# Altium PCB PCB1.PcbDoc
Units mil, origin at the board's own origin, x right, y up, seen from the top; angles counter-clockwise.
Board outline 6000 x 4000 mil, 2 copper layers (Top Layer, Bottom Layer); 72 components, 79 nets, 323 pads, 0 vias.
Unrouted connection lines stored in the file: 220.
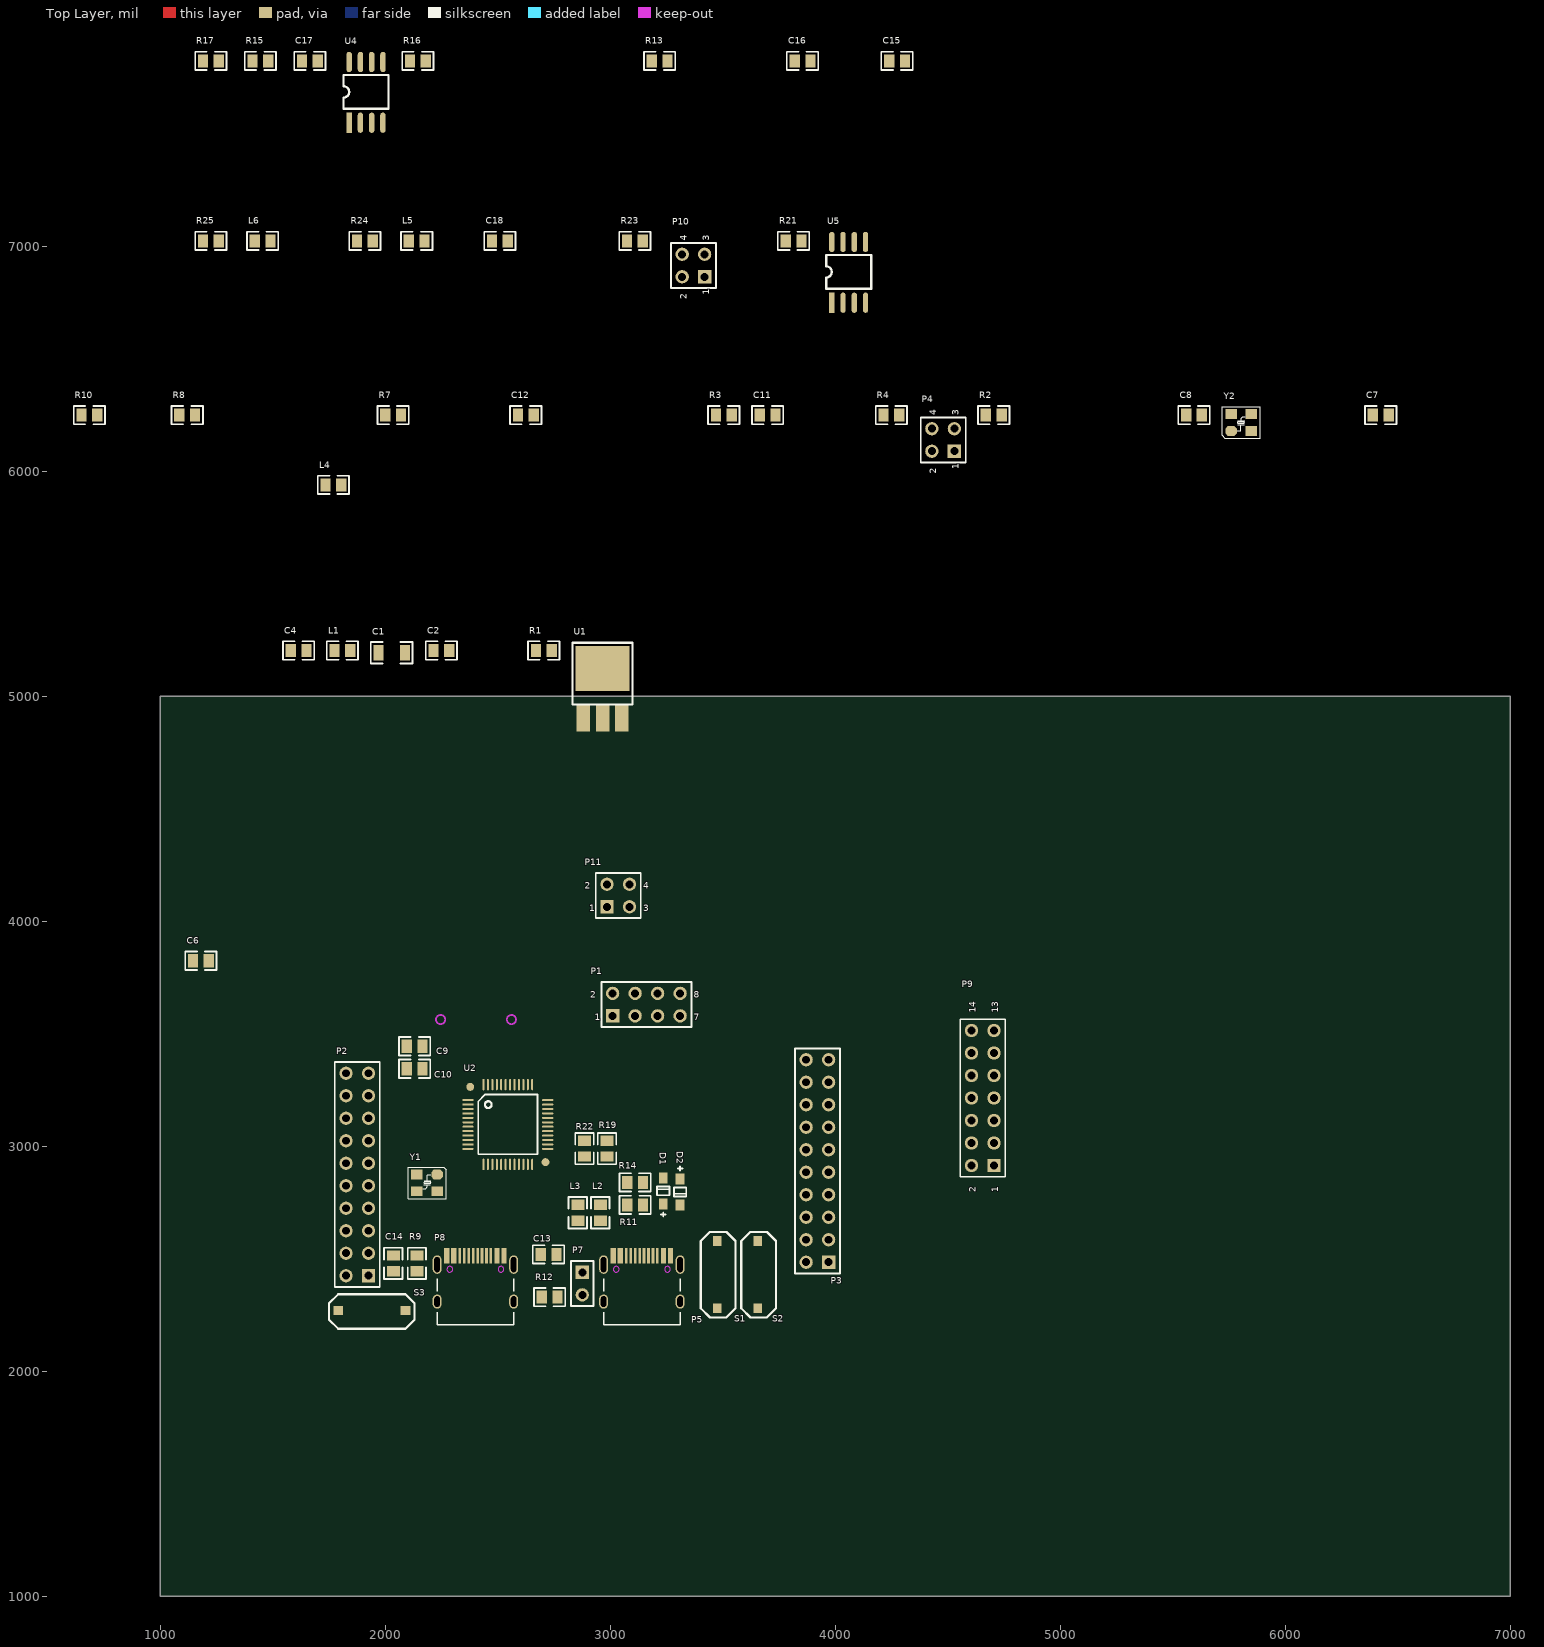
[diagram p0: Top Layer view]
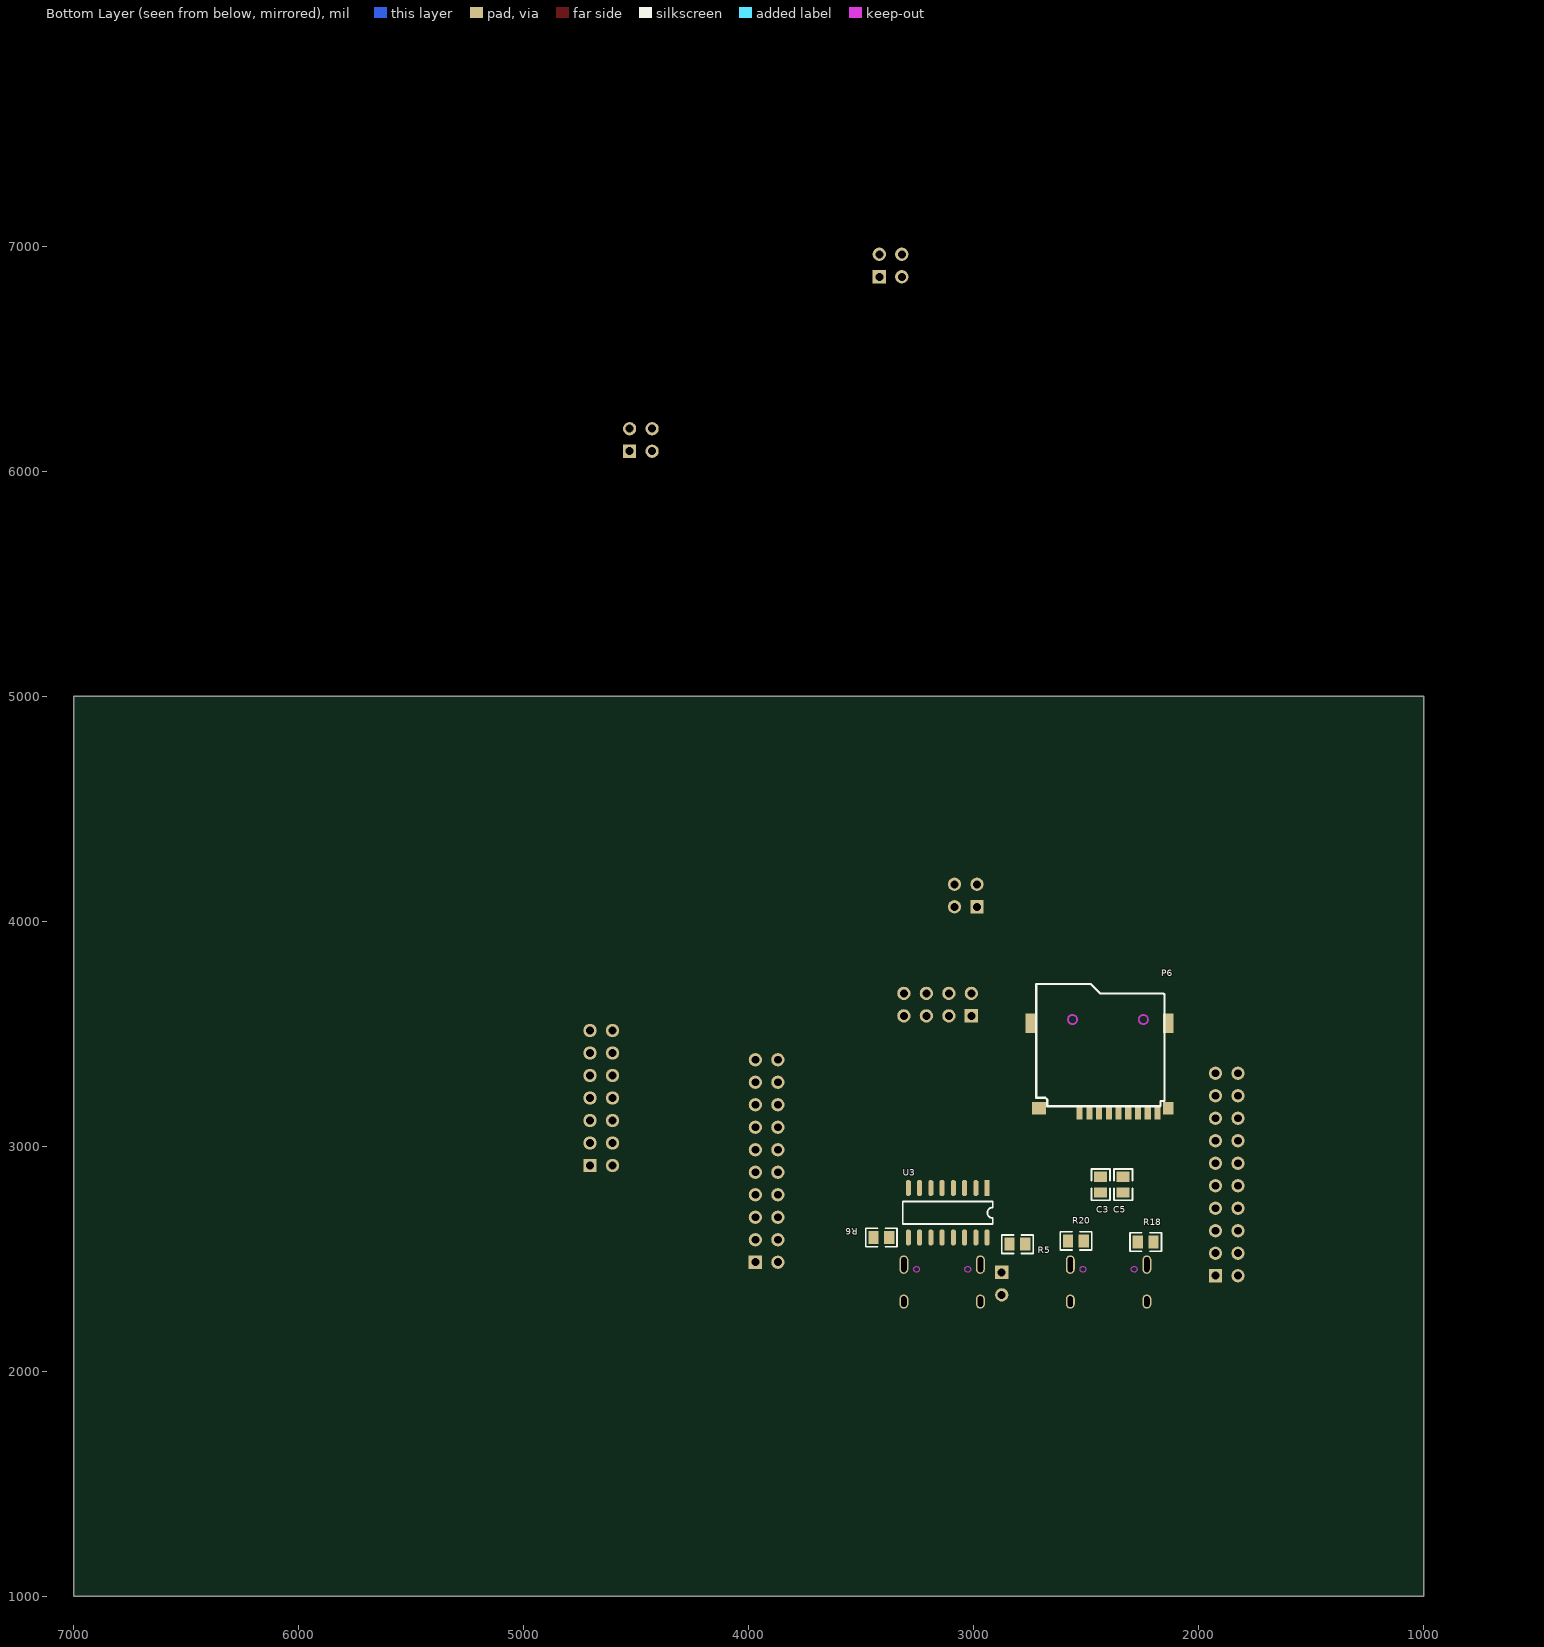
[diagram p1: Bottom Layer view, seen from below]

## Layer stack, top to bottom
Top Solder: solder mask 0.4, Solder Resist, Dk 3.5
Top Layer: signal copper 1.4
Dielectric 1: dielectric 12.6, FR-4, Dk 4.8
Bottom Layer: signal copper 1.4
Bottom Solder: solder mask 0.4, Solder Resist, Dk 3.5

## Board outline
1000,1000 7000,1000 7000,5000 1000,5000

## Design rules (kind name [scope] priority, off if disabled: settings)
Clearance [All] p1: gap=5 ignorepadtopadclearanceinfootprint=FALSE
PolygonConnect [All] p1: connectstyle=Relief reliefconductorwidth=10 reliefentries=4 polygonreliefangle="90 Angle" airgapwidth=10
RoutingVias [All] p1: holewidth=28 width=50 viastyle="Through Hole" minholewidth=28 minwidth=50 maxholewidth=28 maxwidth=50
SolderMaskExpansion [All] p1: expansion=4 istentingtop=FALSE
Width [All] p1: maxlimit=10 minlimit=10 preferedwidth=10
30 further rules are at their usual default settings.

## Components (designator, comment, footprint, x,y, rotation, side; value= is the part's Value field where it differs from the comment)
C1 "10uF" 1206 1969,5194 r0 top
C2 "2.2uF" 0805 2214,5204 r0 top
C3 "12pF" 0805 2435,2865.08 r270 bottom
C4 "0.1uF" 0805 1579,5204 r0 top
C5 "12pF" 0805 2335,2865.08 r270 bottom
C6 "20pF" 0805 1144.92,3825 r0 top
C7 "0.1uF" 0805 6389,6250 r0 top
C8 "20pF" 0805 5559,6250 r0 top
C9 "Cap" 0805 2095,3445 r0 top value=0.1uF
C10 "Cap" 0805 2095,3345 r0 top value=0.1uF
C11 "0.1uF" 0805 3664,6250 r0 top
C12 "0.1uF" 0805 2589,6250 r0 top
C13 "0.1uF" 0805 2760,2520 r180 top
C14 "0.1uF" 0805 2035,2444.92 r90 top
C15 "10uF" 0805 4239,7825 r0 top
C16 "0.1uF" 0805 3819,7825 r0 top
C17 "0.1uF" 0805 1629,7825 r0 top
C18 "0.1uF" 0805 2474,7025 r0 top
D1 "B0520" SOD-123 3235,2743.86 r90 top
D2 "B0520" SOD-123 3310,2855 r270 top
L1 "LED" 0805 1774,5204 r0 top
L2 "LED" 0805 2955,2669.92 r90 top
L3 "LED" 0805 2855,2669.92 r90 top
L4 "LED" 0805 1734,5940 r0 top
L5 "LED" 0805 2104,7025 r0 top
L6 "LED" 0805 1419,7025 r0 top
P1 "Header 4X2" HDR2X4 3010,3580 r0 top
P2 "Header 10X2" HDR2X10 1925,2425 r90 top
P3 "Header 10X2" HDR2X10 3970,2485 r90 top
P4 "Header 2X2" HDR2X2 4529,6090 r90 top
P5 "USBC-REC" TYPE-C-Receptacle-2.0 3139.84,2512.76 r0 top
P6 "TF_CARD" TF_CARD 2528.7,3150.32 r180 bottom
P7 "Header 2" HDR1X2 2875,2440 r270 top
P8 "USBC-REC" TYPE-C-Receptacle-2.0 2399.92,2512.76 r0 top
P9 "Header 7X2" HDR2X7 4705,2915 r90 top
P10 "Header 2X2" HDR2X2 3419,6865 r90 top
P11 "Header 2X2" HDR2X2 2985,4065 r0 top
R1 "1K" 0805 2669,5204 r0 top
R2 "10K" 0805 4669,6250 r0 top
R3 "10K" 0805 3469,6250 r0 top
R4 "0" 0805 4214,6250 r0 top
R5 "5.1K" 0805 2769.92,2565 r0 bottom value=5.1k
R6 "5.1K" 0805 3445,2595 r180 bottom value=5.1k
R7 "10K" 0805 1999,6250 r0 top
R8 "10K" 0805 1084,6250 r0 top
R9 "10K" 0805 2140,2444.92 r90 top
R10 "0" 0805 649,6250 r0 top
R11 "1K" 0805 3075,2740 r0 top
R12 "1K" 0805 2694.92,2330 r0 top
R13 "10K" 0805 3184,7825 r0 top
R14 "1K" 0805 3074.92,2840 r0 top
R15 "10K" 0805 1409,7825 r0 top
R16 "1K" 0805 2109,7825 r0 top
R17 "10K" 0805 1189,7825 r0 top
R18 "5.1K" 0805 2199.92,2575 r0 bottom value=5.1k
R19 "270" 0805 2985,2955 r90 top
R20 "5.1K" 0805 2580,2580 r180 bottom value=5.1k
R21 "10K" 0805 3779,7025 r0 top
R22 "270" 0805 2885,2954.92 r90 top
R23 "0" 0805 3074,7025 r0 top
R24 "1K" 0805 1874,7025 r0 top
R25 "1K" 0805 1189,7025 r0 top
S1 "SW-PB" "sw - 3*6*2.5" 3475,2280 r90 top
S2 "SW-PB" "sw - 3*6*2.5" 3655,2280 r90 top
S3 "SW-PB" "sw - 3*6*2.5" 1790,2270 r0 top
U1 "TLV1117" SOT-223 2879,4904 r0 top
U2 "CH32V203CxT" LQFP48 2367.05,3205.43 r270 top
U3 "CH549G" SOP16 2940,2815 r0 bottom
U4 "24c01" SOIC-8_208mil 1839,7550 r0 top
U5 "w25q16" SOIC-8_208mil 3984,6750 r0 top
Y1 "32.768" XT3225 2230,2875 r180 top
Y2 "8M" XT3225 5759,6180 r0 top

## Footprints (in the part's own frame and the unit in brackets; to place one, negate y for a bottom-side part, rotate by r counter-clockwise, add the part's x,y. Pads: shape width x height; smd on the part's side, far side on the other; paste and mask are expansions set on the pad)
0805 [mm]
  rect 1.16x1.47 smd: 1(0,0) 2(1.78,0)
  silkscreen extent -0.88,-1.04 2.66,1.03
1206 [mm]
  rect 1.13x1.8 smd: 1(0,0) 2(2.98,0)
  silkscreen extent -0.87,-1.2 3.84,1.2
HDR1X2 [mm] "Connector; Header; 2 Position"
  rect 1.5x1.5 hole 0.9: 1(0,0)
  round 1.5 hole 0.9: 2(2.54,0)
  silkscreen extent -1.27,-1.27 3.81,1.27
HDR2X2 [mm] "Connector; Header; 2x2 Position"
  rect 1.5x1.5 hole 0.9: 1(0,0)
  round 1.5 hole 0.9: 2(0,2.54) 3(2.54,0) 4(2.54,2.54)
  silkscreen extent -1.27,-1.27 3.81,3.81
HDR2X4 [mm] "Connector; Header; 4x2 Position"
  rect 1.5x1.5 hole 0.9: 1(0,0)
  round 1.5 hole 0.9: 2(0,2.54) 3(2.54,0) 4(2.54,2.54) 5(5.08,0) 6(5.08,2.54) 7(7.62,0) 8(7.62,2.54)
  silkscreen extent -1.27,-1.27 8.89,3.81
HDR2X7 [mm] "Connector; Header; 7x2 Position"
  rect 1.5x1.5 hole 0.9: 1(0,0)
  round 1.5 hole 0.9: 2(0,2.54) 3(2.54,0) 4(2.54,2.54) 5(5.08,0) 6(5.08,2.54) 7(7.62,0) 8(7.62,2.54) 9(10.16,0) 10(10.16,2.54) 11(12.7,0) 12(12.7,2.54) 13(15.24,0) 14(15.24,2.54)
  silkscreen extent -1.27,-1.27 16.51,3.81
HDR2X10 [mm] "Connector; Header; 10x2 Position"
  rect 1.5x1.5 hole 0.9: 1(0,0)
  round 1.5 hole 0.9: 2(0,2.54) 3(2.54,0) 4(2.54,2.54) 5(5.08,0) 6(5.08,2.54) 7(7.62,0) 8(7.62,2.54) 9(10.16,0) 10(10.16,2.54) 11(12.7,0) 12(12.7,2.54) 13(15.24,0) 14(15.24,2.54) 15(17.78,0) 16(17.78,2.54) 17(20.32,0) 18(20.32,2.54) 19(22.86,0) 20(22.86,2.54)
  silkscreen extent -1.27,-1.27 24.13,3.81
LQFP48 [mm]
  round 0.889 smd: 0(-1.496,0.254) 0(6.996,8.746)
  rect 0.229x1.27 smd: 1(0,0)
  oval 0.229x1.27 smd: 2(0.5,0) 3(1,0) 4(1.5,0) 5(2,0) 6(2.5,0) 7(3,0) 8(3.5,0) 9(4,0) 10(4.5,0) 11(5,0) 12(5.5,0) 25(5.5,9) 26(5,9) 27(4.5,9) 28(4,9) 29(3.5,9) 30(3,9) 31(2.5,9) 32(2,9) 33(1.5,9) 34(1,9) 35(0.5,9) 36(0,9)
  oval 1.27x0.229 smd: 13(7.25,1.75) 14(7.25,2.25) 15(7.25,2.75) 16(7.25,3.25) 17(7.25,3.75) 18(7.25,4.25) 19(7.25,4.75) 20(7.25,5.25) 21(7.25,5.75) 22(7.25,6.25) 23(7.25,6.75) 24(7.25,7.25) 37(-1.75,7.25) 38(-1.75,6.75) 39(-1.75,6.25) 40(-1.75,5.75) 41(-1.75,5.25) 42(-1.75,4.75) 43(-1.75,4.25) 44(-1.75,3.75) 45(-1.75,3.25) 46(-1.75,2.75) 47(-1.75,2.25) 48(-1.75,1.75)
  silkscreen extent -0.65,1.15 6.11,7.86
SOD-123 [mm]
  rect 1.25x1 smd: 1(0,0) 2(2.95,0)
  silkscreen extent -1.43,-0.7 1.97,0.7
SOIC-8_208mil [mil]
  rect 24x90 smd: 1(0,0)
  oval 24x90 smd: 2(50,0) 3(100,0) 4(150,0) 5(150,270) 6(100,270) 7(50,270) 8(0,270)
  silkscreen extent -25,62 175,212
SOP16 [mil]
  rect 22x72 smd: 1(0,0)
  oct 22x72 smd: 2(50,0) 3(100,0) 4(150,0) 5(200,0) 6(250,0) 7(300,0) 8(350,0) 9(350,220) 10(300,220) 11(250,220) 12(200,220) 13(150,220) 14(100,220) 15(50,220) 16(0,220)
  silkscreen extent -25,60 375,160
SOT-223 [mil]
  rect 60x120 smd: 1(0,0) 2(86,0) 3(172,0)
  rect 240x200 smd: ""(86,220)
  silkscreen extent -47,60 219,335
"sw - 3*6*2.5" [mm]
  rect 1.1x1 smd: 1(0,0) 2(7.6,0)
  silkscreen extent -1.03,-2.05 8.61,1.85
TF_CARD [mm]
  rect 0.7x1.6 smd: 1(0,0) 2(1.1,0) 3(2.2,0) 4(3.3,0) 5(4.4,0) 6(5.5,0) 7(6.6,0) 8(7.7,0) 9(8.8,0)
  rect 1.2x2.2 smd: 10(-5.5,10.1) 10(10,10.1)
  rect 1.6x1.4 smd: 10(-4.6,0.5)
  rect 1.2x1.4 smd: 10(10,0.5)
  Keep-Out Layer circle w0.2: c7.2,10.5 r0.52
  Keep-Out Layer circle w0.2: c-0.8,10.5 r0.52
  silkscreen extent -4.9,0.7 9.59,14.52
TYPE-C-Receptacle-2.0 [mm]
  oval 1x1.6 hole 0.6 slot 1.2 at 90 deg: 0(-4.32,-5.15) 0(4.32,-5.15)
  oval 1x2.1 hole 0.6 slot 1.7 at 90 deg: 0(-4.32,-0.97) 0(4.32,-0.97)
  rect 0.6x1.75 smd: A1(-3.225,0) A4(-2.45,0) B1(3.225,0) B4(2.45,0)
  rect 0.3x1.75 smd: A5(-1.25,0) A6(-0.25,0) A7(0.25,0) A8(1.25,0) B5(1.75,0) B6(0.75,0) B7(-0.75,0) B8(-1.75,0)
  Keep-Out Layer circle w0.1: c-2.89,-1.5 r0.325
  Keep-Out Layer circle w0.1: c2.89,-1.5 r0.325
  silkscreen extent -4.32,-7.75 4.32,-2.55
XT3225 [mm]
  oct 1.3x1.1 smd: 1(0,0)
  rect 1.3x1.1 smd: 2(2.3,0) 3(2.3,1.9) 4(0,1.9)
  silkscreen extent -1.02,-0.8 3.27,2.74

## Part data
C1: library part Cap, "坦电容", LatestRevisionDate=17-Jul-2002, LatestRevisionNote="Re-released for DXP Platform.", PackageDescription="Radial Cap, Thru-Hole; 2 Leads; 0.3 in Pin Spacing", PackageReference=RAD-0.3, Published=8-Jun-2000, Publisher="Altium Limited"
C2 C3 C4 C5 C6 C7 C8 C11 C12 C13 C14 C15 C16 C17 C18: library part Cap, "Capacitor", LatestRevisionDate=17-Jul-2002, LatestRevisionNote="Re-released for DXP Platform.", PackageDescription="Radial Cap, Thru-Hole; 2 Leads; 0.3 in Pin Spacing", PackageReference=RAD-0.3, Published=8-Jun-2000, Publisher="Altium Limited"
C9 C10: "Capacitor", LatestRevisionDate=17-Jul-2002, LatestRevisionNote="Re-released for DXP Platform.", PackageDescription="Radial Cap, Thru-Hole; 2 Leads; 0.3 in Pin Spacing", PackageReference=RAD-0.3, Published=8-Jun-2000, Publisher="Altium Limited"
D1 D2: library part Diode, "Default Diode", Code_JEDEC=DO-214-AB, LatestRevisionDate=17-Jul-2002, LatestRevisionNote="Re-released for DXP Platform.", PackageDescription="DO-214-AB/SMC; 2 C-Bend Leads; Body 7.9 x 5.9 mm, inc. leads (LxW)", PackageReference=SMC, PackageVersion=Sep-1996, Published=8-Jun-2000, Publisher="Altium Limited"
P1: "Header, 4-Pin, Dual row", LatestRevisionDate=17-Jul-2002, LatestRevisionNote="Re-released for DXP Platform.", Publisher="Altium Limited"
P2 P3: "Header, 10-Pin, Dual row", LatestRevisionDate=17-Jul-2002, LatestRevisionNote="Re-released for DXP Platform.", Publisher="Altium Limited"
P4 P10 P11: "Header, 2-Pin, Dual row", LatestRevisionDate=17-Jul-2002, LatestRevisionNote="Re-released for DXP Platform.", Publisher="Altium Limited"
P5 P8: "USB Type-C USB"
P6: "TF card interface"
P7: "Header, 2-Pin", LatestRevisionDate=17-Jul-2002, LatestRevisionNote="Re-released for DXP Platform.", Publisher="Altium Limited"
P9: "Header, 7-Pin, Dual row", LatestRevisionDate=17-Jul-2002, LatestRevisionNote="Re-released for DXP Platform.", Publisher="Altium Limited"
R1 R2 R3 R4 R7 R8 R9 R10 R13 R15 R17 R21 R23 R24 R25: library part Res2, "Resistor", LatestRevisionDate=17-Jul-2002, LatestRevisionNote="Re-released for DXP Platform.", PackageDescription="Axial Device, Thru-Hole; 2 Leads; 0.4 in Pin Spacing", PackageReference=AXIAL-0.4, Published=8-Jun-2000, Publisher="Altium Limited"
R5 R6 R11 R12 R14 R16 R18 R19 R20 R22: library part Res3, "Resistor", LatestRevisionDate=29-May-2009, LatestRevisionNote="IPC-7351 Footprint Added.", PackageDescription="Chip Resistor", PackageReference=J1-0603, Published=8-Jun-2000, Publisher="Altium Limited"
S1 S2 S3: "Switch", LatestRevisionDate=17-Jul-2002, LatestRevisionNote="Re-released for DXP Platform.", PackageDescription="Switch; 2 Leads", PackageReference=SPST-2, Published=24-Mar-1999, Publisher="Altium Limited"
U1: library part LDO1117, "LDO"
U2: "RISC-V MCU,144MHz, 2*USB FS, CAN"
U3: "8bit MCS51 MCU with ADC & USB type-C host & device & dual UART & SPI"
Y1 Y2: library part XTAL, "Crystal Oscillator", LatestRevisionDate=17-Jul-2002, LatestRevisionNote="Re-released for DXP Platform.", PackageDescription="Crystal, Thru-Hole; 2 Leads; Body 3.1 x 8.2 mm (Dia.xH)", PackageReference=R38, Published=8-Jun-2000, Publisher="Altium Limited"

## Nets (pads, with @x,y where several pads share a name; then routed paths per layer and width w, separated by ;. In a path a pad name is that pad's centre, name@x,y a point inside that pad or via, vN(x,y) a via of type N, cw(c..) or ccw(c..) an arc to the next point about the centre after c; other vN are vias at no path point)
5V: C1.2 C12.2 L2.1 L3.1 L4.1 P1.6 P1.8 P5.A4 P5.B4 P8.A4 P8.B4 P9.1 P9.2 U1.3 U3.15
BOOT0: R3.2 U2.44
BOOT1: P3.13 R2.2 U2.20
CLK: P2.12 P9.10 U2.37
CLK0: P9.9 R19.2
D_SWCLK: R19.1 U3.2
D_SWDIO: R22.1 U3.1
DIO: P2.15 P9.12 U2.34
DIO0: P9.11 R22.2
GND: C1.1 C2.1 C3.1 C4.1 C5.2 C6.1 C7.1 C8.2 C9.1 C10.1 C11.1 C12.1 C13.1 C14.1 C15.1 C16.1 C17.1 C18.1 L1.2 P1.1 P1.3 P1.5 P1.7 P2.14 P4.1 P4.2 P5.A1 P5.B1 P6.6 P6.10 P8.A1 P8.B1 P9.7 P9.8 R5.1 R6.1 R16.2 R18.1 R20.1 S1.1 S2.1 S3.2 U1.1 U2.8 U2.23 U2.35 U2.47 U3.14 U4.1 U4.2 U4.3 U4.4 U4.7 U5.4
IIC_SCL: P10.2 R15.1 U4.6
IIC_SDA: P10.4 R17.1 U4.5
LED_CON: R11.2 U3.5
LED_RUN: R14.2 U3.4
NetC17_2: C17.2 R15.2 R17.2 U4.8
NetL1_1: L1.1 R1.1
NetL2_2: L2.2 R11.1
NetL3_2: L3.2 R14.1
NetL4_2: L4.2 R16.1
NetL5_1: L5.1 R24.2
NetL5_2: L5.2 P11.1
NetL6_1: L6.1 R25.2
NetL6_2: L6.2 P11.3
NetP4_3: P4.3 R3.1
NetP4_4: P4.4 R2.1
NetP5_A5: P5.A5 R5.2
NetP5_B5: P5.B5 R6.2
NetP6_1: P6.1 R7.1
NetP6_2: P6.2 R8.1 R10.1
NetP6_8: P6.8 R13.2
NetP7_2: P7.2 R12.2
NetP8_A5: P8.A5 R18.2
NetP8_B5: P8.B5 R20.2
NetR21_1: R21.1 R23.1 U5.1
NRST: C14.2 P2.13 R9.2 S3.1 U2.7
PA0: P3.3 U2.10
PA1: P3.4 S1.2 U2.11
PA2: P3.5 R23.2 S2.2 U2.12
PA3: P3.6 R10.2 U2.13
PA4: P3.7 U2.14
PA5: P3.8 P6.5 U2.15 U5.6
PA6: P3.9 P6.7 U2.16 U5.2
PA7: P3.10 P6.3 U2.17 U5.5
PA8: P2.20 P6.9 U2.29
PA9: P2.19 P9.4 U2.30
PA10: P2.18 P9.6 U2.31
PA11: P2.17 P8.A7 P8.B7 U2.32
PA12: P2.16 P8.A6 P8.B6 U2.33
PA15: P2.11 U2.38
PB0: P3.11 U2.18
PB1: P3.12 U2.19
PB3: P2.10 P11.2 U2.39
PB4: P2.9 P11.4 U2.40
PB5: P2.8 U2.41
PB6: P2.7 U2.42
PB7: P2.6 U2.43
PB8: P2.5 U2.45
PB9: P2.3 U2.46
PB10: P3.14 P10.1 U2.21
PB11: P3.15 P10.3 U2.22
PB12: P3.16 U2.25
PB13: P3.17 U2.26
PB14: P3.18 U2.27
PB15: P3.19 U2.28
PC13: P2.4 U2.2
PC14: C3.2 U2.3 Y1.3
PC15: C5.1 U2.4 Y1.1
PD0: C6.2 P3.1 U2.5 Y2.3
PD1: C8.1 P3.2 U2.6 Y2.1
RX0: D1.2 P9.3
TX0: D2.1 P9.5
UART0_RX: D1.1 U3.7
UART0_TX: D2.2 U3.8
USB_N: P5.A7 P5.B7 U3.13
USB_P: P5.A6 P5.B6 P7.1 U3.12
V33: C13.2 R12.1 U3.16
VBAT: C9.2 P2.1 U2.1
VCC: C2.2 C4.2 C7.2 C11.2 C15.2 C16.2 C18.2 P1.2 P1.4 P2.2 P3.20 P6.4 P9.13 P9.14 R1.2 R4.2 R7.2 R8.2 R9.1 R13.1 R21.2 R24.1 R25.1 U1.2 U2.24 U2.36 U2.48 U5.3 U5.7 U5.8
VDDA: C10.2 R4.1 U2.9
pads on no net: P5.0 P5.A8 P5.B8 P8.0 P8.A8 P8.B8 U1. U2.0 U3.3 U3.6 U3.9 U3.10 U3.11 Y1.2 Y1.4 Y2.2 Y2.4

## Text inside footprints (layer, text, board x,y; h text height)
P1: Top Overlay "2" at 2910,3660 h30; Top Overlay "1" at 2930,3560 h30; Top Overlay "7" at 3370,3560 h30; Top Overlay "8" at 3370,3660 h30
P4: Top Overlay "1" at 4549,6010 h30 r90; Top Overlay "2" at 4449,5990 h30 r90; Top Overlay "4" at 4449,6250 h30 r90; Top Overlay "3" at 4549,6250 h30 r90
P9: Top Overlay "2" at 4625,2795 h30 r90; Top Overlay "1" at 4725,2795 h30 r90; Top Overlay "14" at 4625,3595 h30 r90; Top Overlay "13" at 4725,3595 h30 r90
P10: Top Overlay "1" at 3439,6785 h30 r90; Top Overlay "2" at 3339,6765 h30 r90; Top Overlay "4" at 3339,7025 h30 r90; Top Overlay "3" at 3439,7025 h30 r90
P11: Top Overlay "1" at 2905,4045 h30; Top Overlay "2" at 2885,4145 h30; Top Overlay "4" at 3145,4145 h30; Top Overlay "3" at 3145,4045 h30